# Altium PCB Ciruit_Analyzer_V1.2.PcbDoc
Units mm, origin at the board's own origin, x right, y up, seen from the top; angles counter-clockwise.
Board outline 62.74 x 37.85 mm, 2 copper layers (Top Layer, Bottom Layer); 14 components, 8 nets, 40 pads, 0 vias.
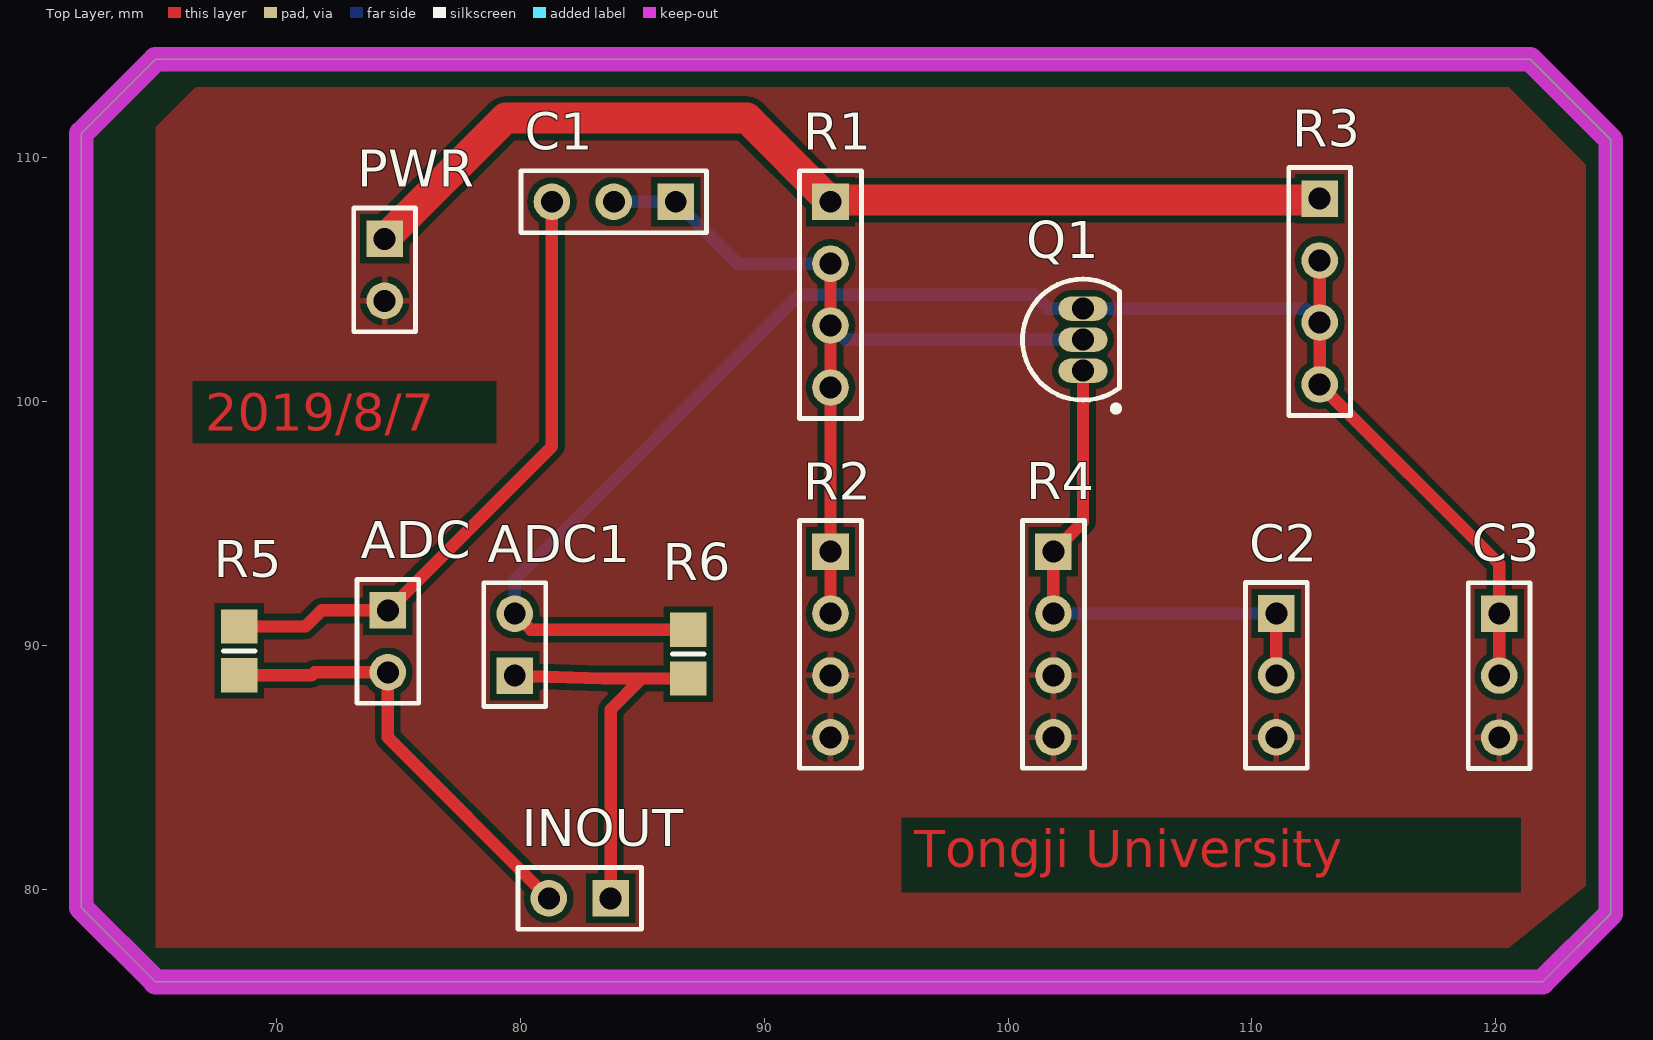
[diagram p0: Top Layer view]
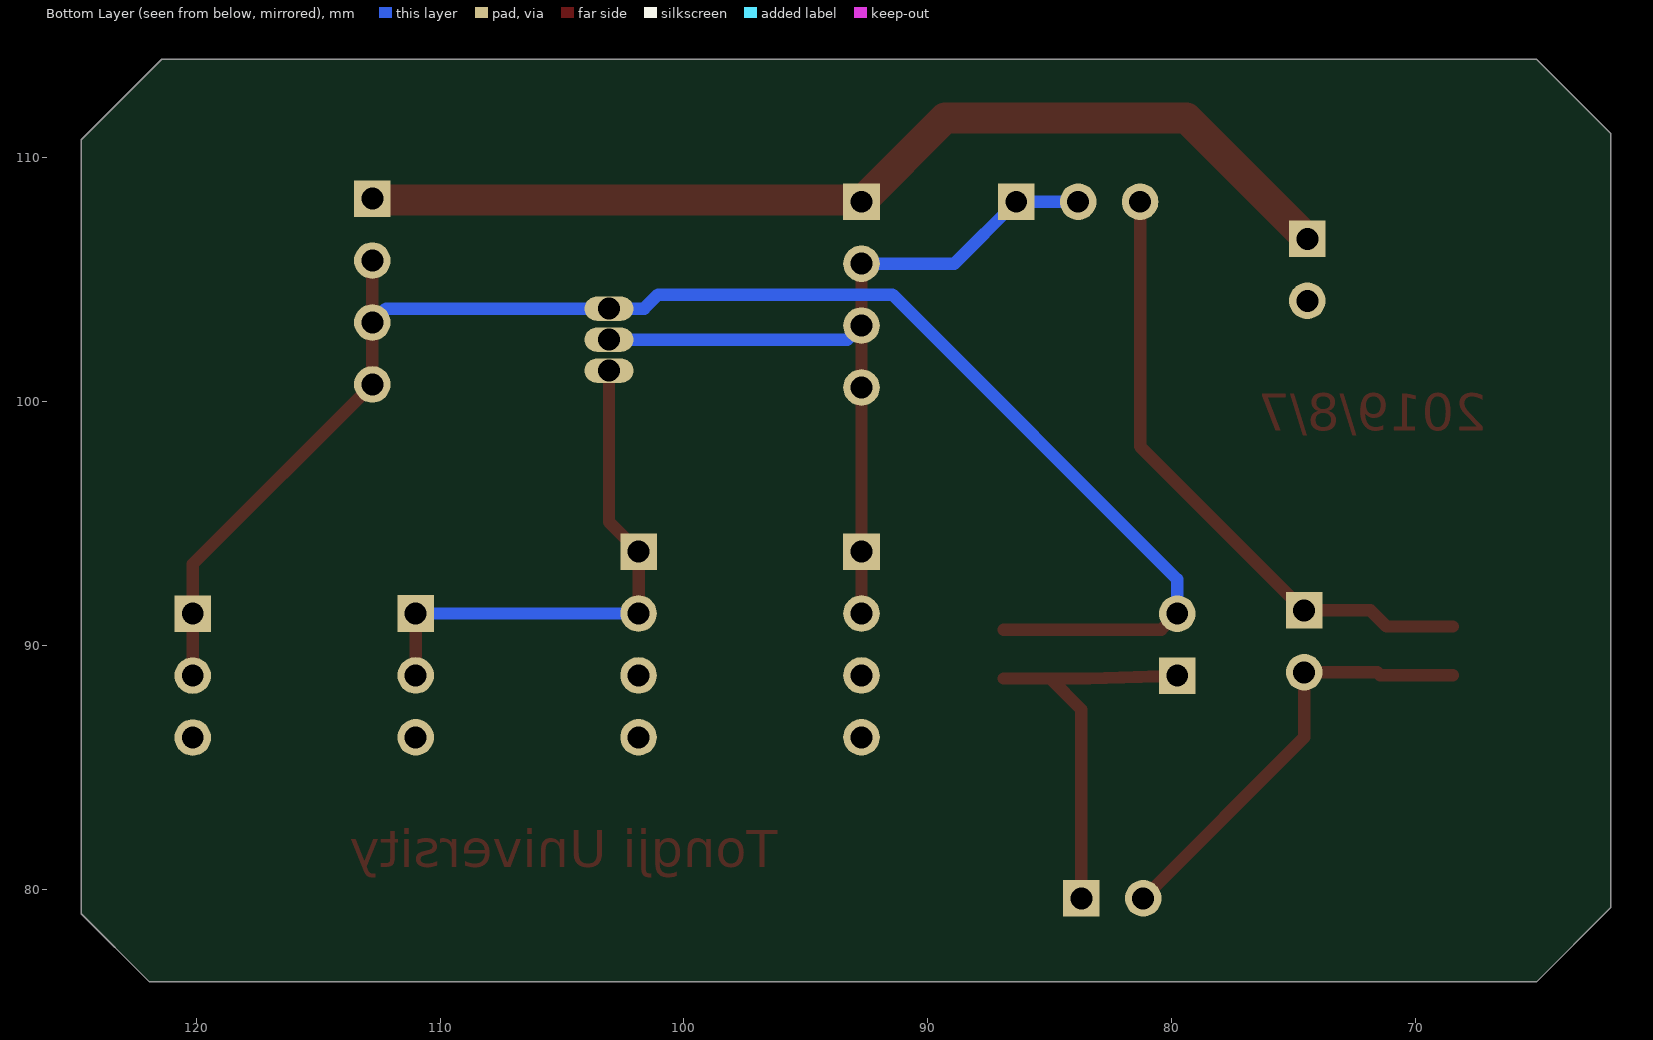
[diagram p1: Bottom Layer view, seen from below]

## Layer stack, top to bottom
Top Solder: solder mask 0.0102, Solder Resist, Dk 3.5
Top Layer: signal copper 0.0356
Dielectric 1: dielectric 0.32, FR-4, Dk 4.8
Bottom Layer: signal copper 0.0356
Bottom Solder: solder mask 0.0102, Solder Resist, Dk 3.5

## Board outline
61.976,79.248 61.976,110.998 65.024,114.046 121.412,114.046 124.714,110.744 124.714,78.994 121.92,76.2 65.024,76.2

## Design rules (kind name [scope] priority, off if disabled: settings)
Clearance [All] p1: gap=0.254 ignorepadtopadclearanceinfootprint=FALSE except(0: Arc-Hole Track-Hole SMDPad-Hole THPad-Hole Via-Hole Fill-Hole Poly-Hole Region-Hole Text-Hole)
PolygonConnect [All] p1: connectstyle=Relief reliefconductorwidth=0.254 reliefentries=4 polygonreliefangle="90 Angle" airgapwidth=0.254
RoutingVias [All] p1: holewidth=0.711 width=1.27 viastyle="Through Hole" minholewidth=0.711 minwidth=1.27 maxholewidth=0.711 maxwidth=1.27
SolderMaskExpansion [All] p1: expansion=0.102
Width [All] p1: maxlimit=1.27 minlimit=0.254 preferedwidth=0.508 minimp=50.000000 maximp=50.000000 favimp=50.000000
30 further rules are at their usual default settings.

## Components (designator, comment, footprint, x,y, rotation, side; value= is the part's Value field where it differs from the comment)
ADC "" HDR1X2 74.549,91.44 r270 top
ADC1 "" HDR1X2 79.756,88.764 r90 top
C1 "10u" HDR1X3 86.36,108.204 r180 top
C2 "47uf" HDR1X3 110.998,91.313 r270 top
C3 "470pf" HDR1X3 120.142,91.304 r270 top
INOUT "" HDR1X2 83.693,79.629 r180 top
PWR "" HDR1X2 74.422,106.68 r270 top
Q1 "9013" TO-92A 103.068,102.548 r0 top
R1 "R1 43K" HDR1X4 92.71,108.204 r270 top
R2 "R2 15K" HDR1X4 92.71,93.853 r270 top
R3 "R3 2K" HDR1X4 112.776,108.331 r270 top
R4 "R4 1K" HDR1X4 101.854,93.853 r270 top
R5 "Res1" 6-0805_M 68.453,89.78 r90 top value=1K
R6 "Res1" 6-0805_M 86.868,89.644 r270 top value=1K

## Footprints (in the part's own frame and the unit in brackets; to place one, negate y for a bottom-side part, rotate by r counter-clockwise, add the part's x,y. Pads: shape width x height; smd on the part's side, far side on the other; paste and mask are expansions set on the pad)
6-0805_M [mm] "Chip Resistor, Body 2.0x1.2mm, IPC Low Density"
  rect 1.4x1.5 smd: 1(-1,0) 2(1,0)
  silkscreen extent 0,-0.65 0,0.65, body extent -1.07,-0.7 1.07,0.7, height 0.7
HDR1X2 [mm] "Connector; Header; 2 Position"
  rect 1.5x1.5 hole 0.9: 1(0,0)
  round 1.5 hole 0.9: 2(2.54,0)
  silkscreen extent -1.27,-1.27 3.81,1.27
HDR1X3 [mm] "Connector; Header; 3 Position"
  rect 1.5x1.5 hole 0.9: 1(0,0)
  round 1.5 hole 0.9: 2(2.54,0) 3(5.08,0)
  silkscreen extent -1.27,-1.27 6.35,1.27
HDR1X4 [mm] "Connector; Header; 4 Position"
  rect 1.5x1.5 hole 0.9: 1(0,0)
  round 1.5 hole 0.9: 2(2.54,0) 3(5.08,0) 4(7.62,0)
  silkscreen extent -1.27,-1.27 8.89,1.27
TO-92A [mm] "TO, Flat Index; 3 In-Line, Axial Leads; Body Dia. 4.5mm; Leads 0.51 x 0.48 mm (max)"
  oval 2x1 hole 0.9: 1(0,-1.27) 2(0,0) 3(0,1.27)
  silkscreen extent -2.48,-2.95 1.5,2.48, body extent -2.48,-2.5 1.5,2.5, height 6.86

## Part data
ADC ADC1 INOUT PWR: library part "Header 2", "Header, 2-Pin", LatestRevisionDate=17-Jul-2002, LatestRevisionNote="Re-released for DXP Platform.", Publisher="Altium Limited"
C1 C2 C3: library part "Header 3", "Header, 3-Pin", LatestRevisionDate=17-Jul-2002, LatestRevisionNote="Re-released for DXP Platform.", Publisher="Altium Limited"
Q1: library part 2N3904, "NPN General Purpose Amplifier", ComponentLink1Description="Manufacturer Link", ComponentLink1URL=http://www.fairchildsemi.com/, ComponentLink2Description=Datasheet, ComponentLink2URL=http://www.fairchildsemi.com/ds/2N%2F2N3904.pdf, DatasheetVersion=1997, LatestRevisionDate=15-Jan-2003, LatestRevisionNote="PCB Footprint 'BCY-W3/D4.7' replaced", PackageDescription="TO, Flat Index; 3 In-Line, Axial Leads; Body Dia. 4.5mm; Leads 0.51 x 0.48 mm (max)", PackageReference=TO-92A, PackageVersion=Sep-1998, Published=8-Jun-2000, Publisher="Altium Limited"
R1 R2 R3 R4: library part "Header 4", "Header, 4-Pin", LatestRevisionDate=17-Jul-2002, LatestRevisionNote="Re-released for DXP Platform.", Publisher="Altium Limited"
R5 R6: "Resistor", LatestRevisionDate=17-Jul-2002, LatestRevisionNote="Re-released for DXP Platform.", PackageDescription="Axial Device, Thru-Hole; 2 Leads; 0.3 in Pin Spacing", PackageReference=AXIAL-0.3, Published=8-Jun-2000, Publisher="Altium Limited"

## Nets (pads, with @x,y where several pads share a name; then routed paths per layer and width w, separated by ;. In a path a pad name is that pad's centre, name@x,y a point inside that pad or via, vN(x,y) a via of type N, cw(c..) or ccw(c..) an arc to the next point about the centre after c; other vN are vias at no path point)
DC+12V: PWR.1 R1.1 R3.1 | length 41.9
  Top Layer w1.27: PWR.1 79.375,111.633 89.281,111.633 R1.1 92.773,108.267 112.712,108.267 R3.1
GND: C2.3 C3.3 PWR.2 R2.3 R2.4 R4.3 R4.4
NetC1_1: C1.1 C1.2 Q1.2 R1.2 R1.3 R1.4 R2.1 R2.2 | length 34.9
  Top Layer w0.508: R2.2 R2.1 R1.4 R1.3 R1.2
  Bottom Layer w0.508: C1.2 C1.1 88.9,105.664 R1.2 ; R1.3 93.286,102.548 Q1.2
NetC2_1: C2.1 C2.2 Q1.1 R4.1 R4.2 | length 22.2
  Top Layer w0.508: R4.2 R4.1 103.068,95.067 Q1.1 ; C2.2 C2.1
  Bottom Layer w0.508: R4.2 C2.1
Ui: ADC.1 C1.3 R5.2 | length 25.9
  Top Layer w0.508: R5.2 71.171,90.78 71.831,91.44 ADC.1 81.28,98.171 C1.3
UiRAW: ADC.2 INOUT.2 R5.1 | length 18.2
  Top Layer w0.508: R5.1 71.425,88.78 71.545,88.9 ADC.2 74.549,86.233 INOUT.2
Uo: ADC1.2 C3.1 C3.2 Q1.3 R3.2 R3.3 R3.4 R6.1 | length 67.2
  Top Layer w0.508: ADC1.2 80.416,90.644 R6.1 ; R3.2 R3.3 R3.4 120.142,93.345 C3.1 C3.2
  Bottom Layer w0.508: ADC1.2 79.756,92.71 91.44,104.394 101.049,104.394 101.625,103.818 Q1.3 112.209,103.818 R3.3
UoRAW: ADC1.1 INOUT.1 R6.2 | length 16.7
  Top Layer w0.508: ADC1.1 83.356,88.644 84.961,88.644 ; INOUT.1 83.693,87.376 84.961,88.644 ; R6.2 84.961,88.644

## Polygon pours and split planes (outlines as drawn)
GND on Top Layer "GND_L01_P000" (solid, remove dead copper, pour order 0): 65.024,111.252 66.675,112.903 120.523,112.903 123.698,109.728 123.698,80.137 120.523,77.597 65.024,77.597

## Keep-outs
Top Layer:
  lines w1.016: 61.976,79.248 61.976,107.823 61.976,110.998 65.024,114.046 121.412,114.046 124.714,110.744 124.714,78.994 121.92,76.2 65.024,76.2 61.976,79.248

## Other copper
Top Layer:
  text "2019/8/7" at 67.056,98.806 h1.52
  text "Tongji University" at 96.139,80.899 h1.52